# Altium PCB PCB1.PcbDoc
Units mm, origin at the board's own origin, x right, y up, seen from the top; angles counter-clockwise.
Board outline 74.42 x 66.29 mm, 2 copper layers (Top Layer, Bottom Layer); 23 components, 25 nets, 99 pads, 1 vias.
Unrouted connection lines stored in the file: 2.
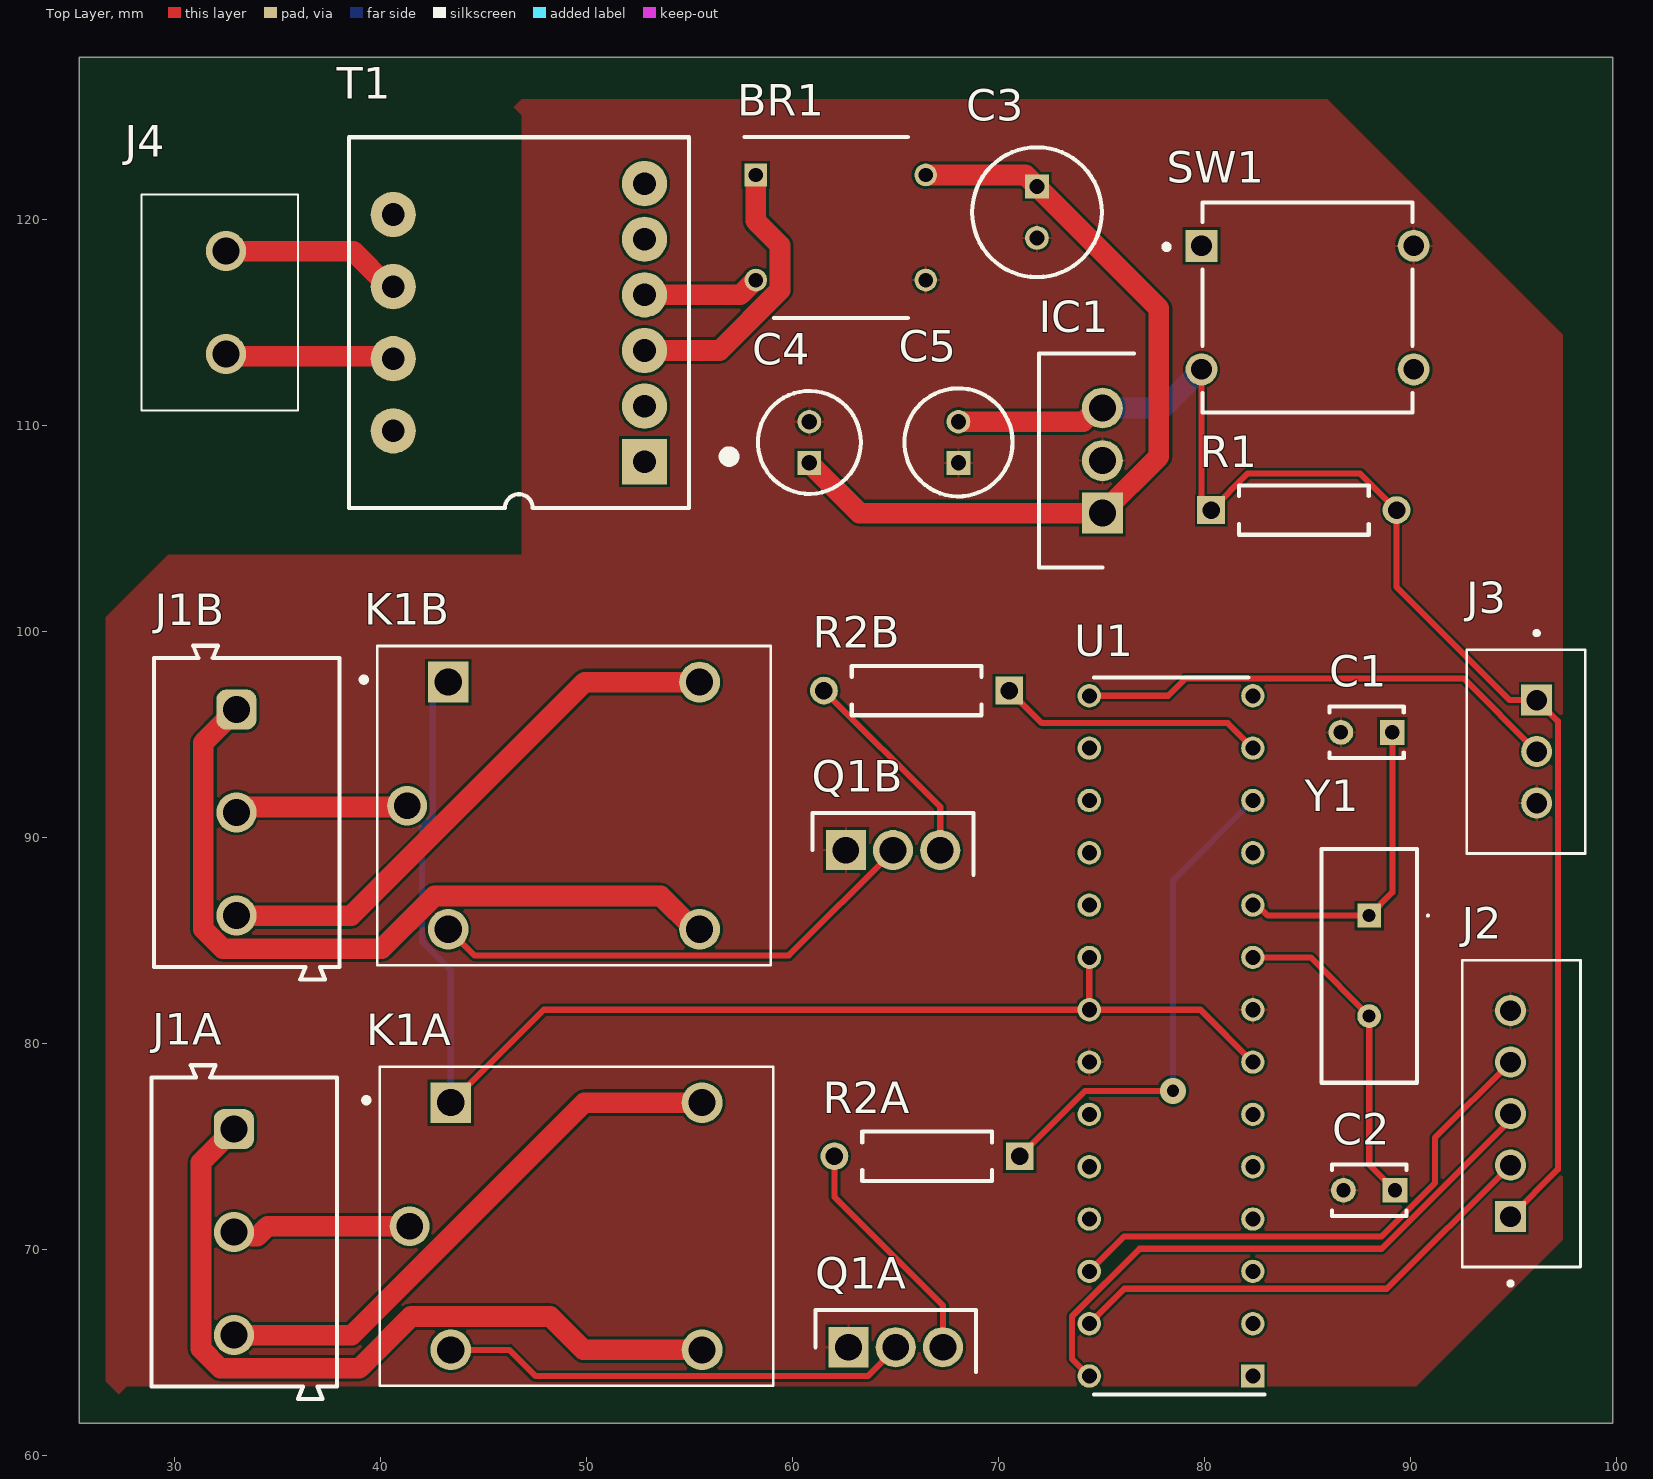
[diagram p0: Top Layer view]
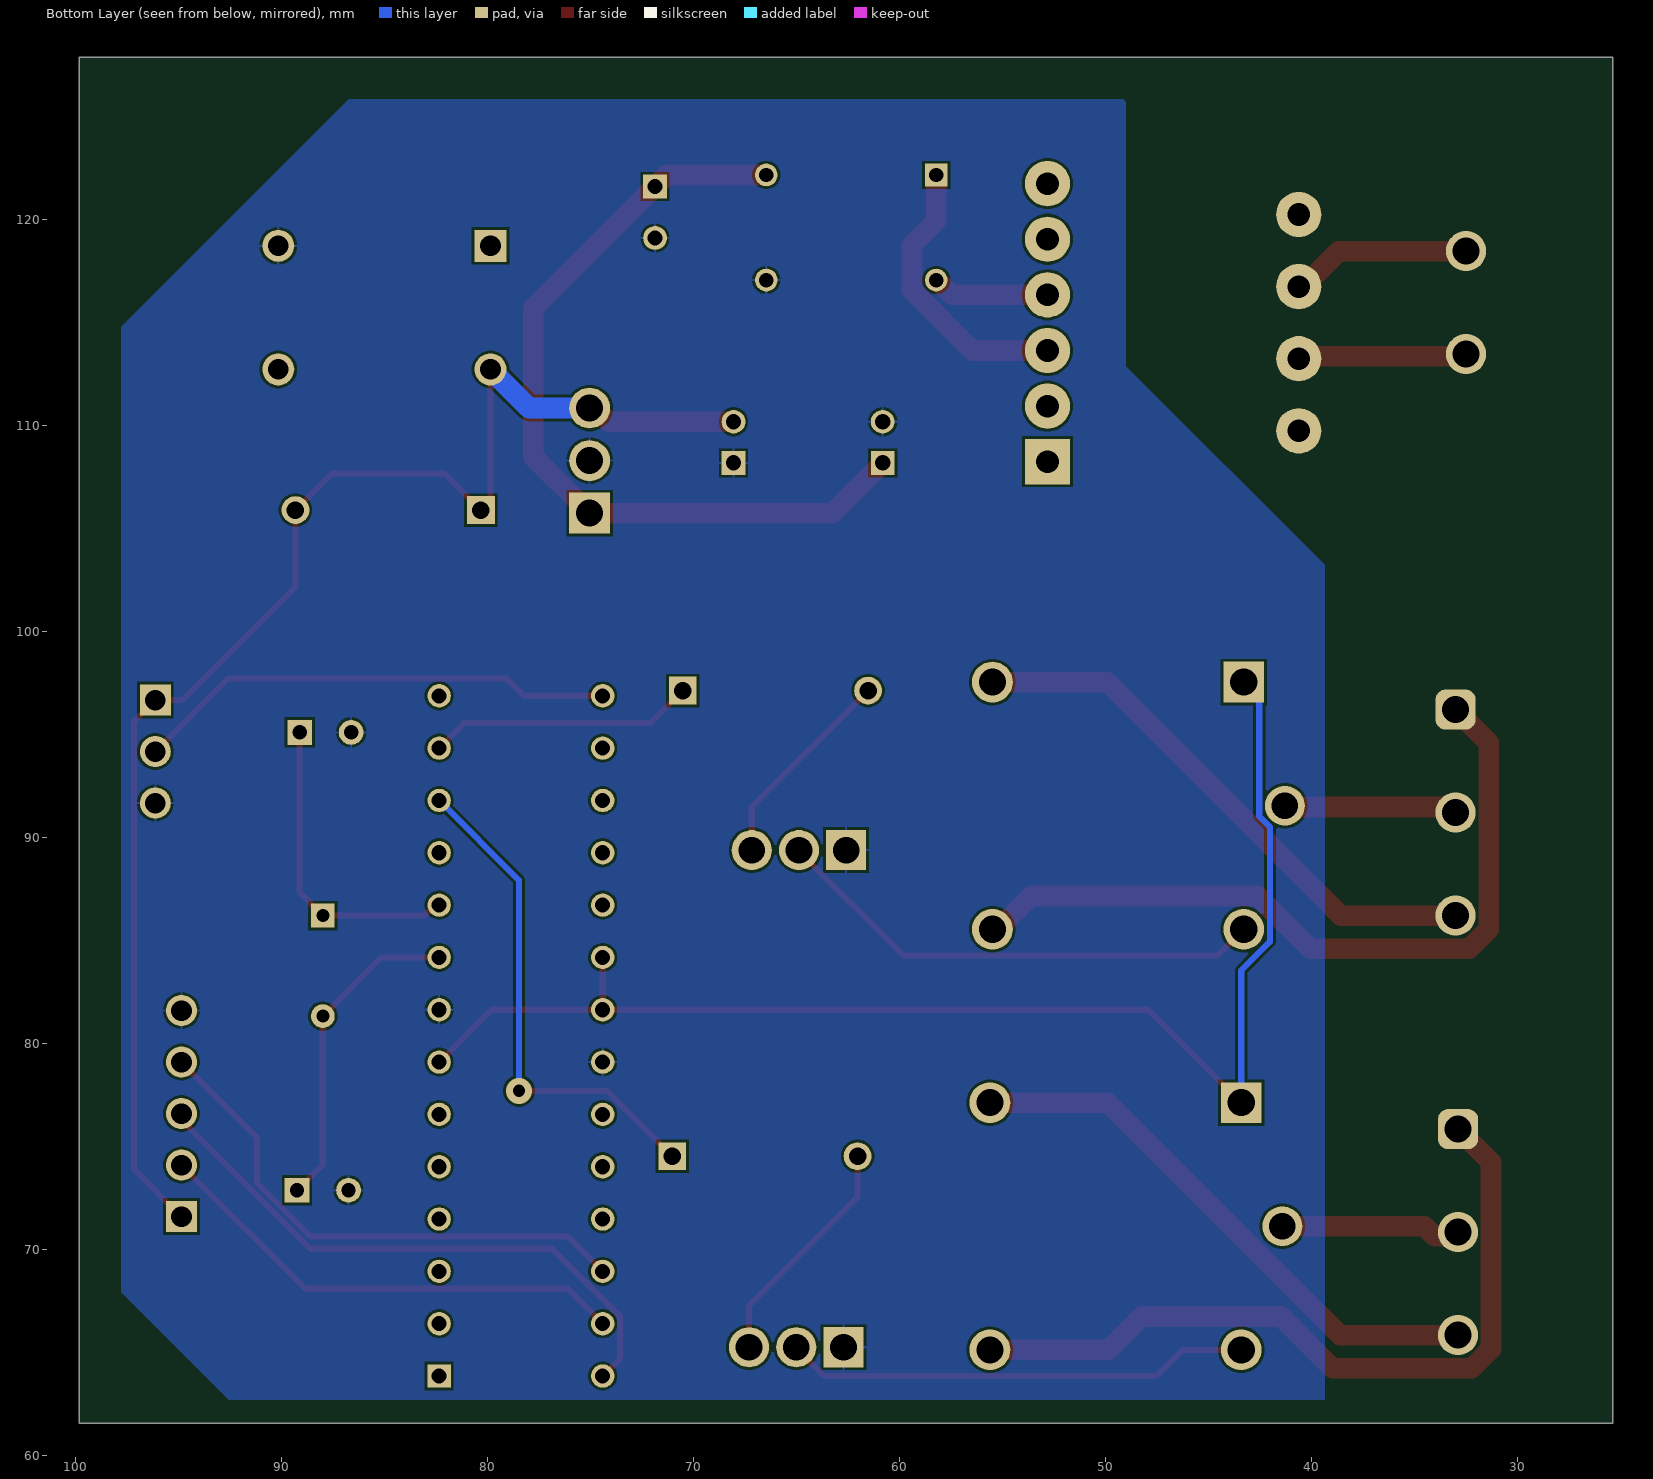
[diagram p1: Bottom Layer view, seen from below]
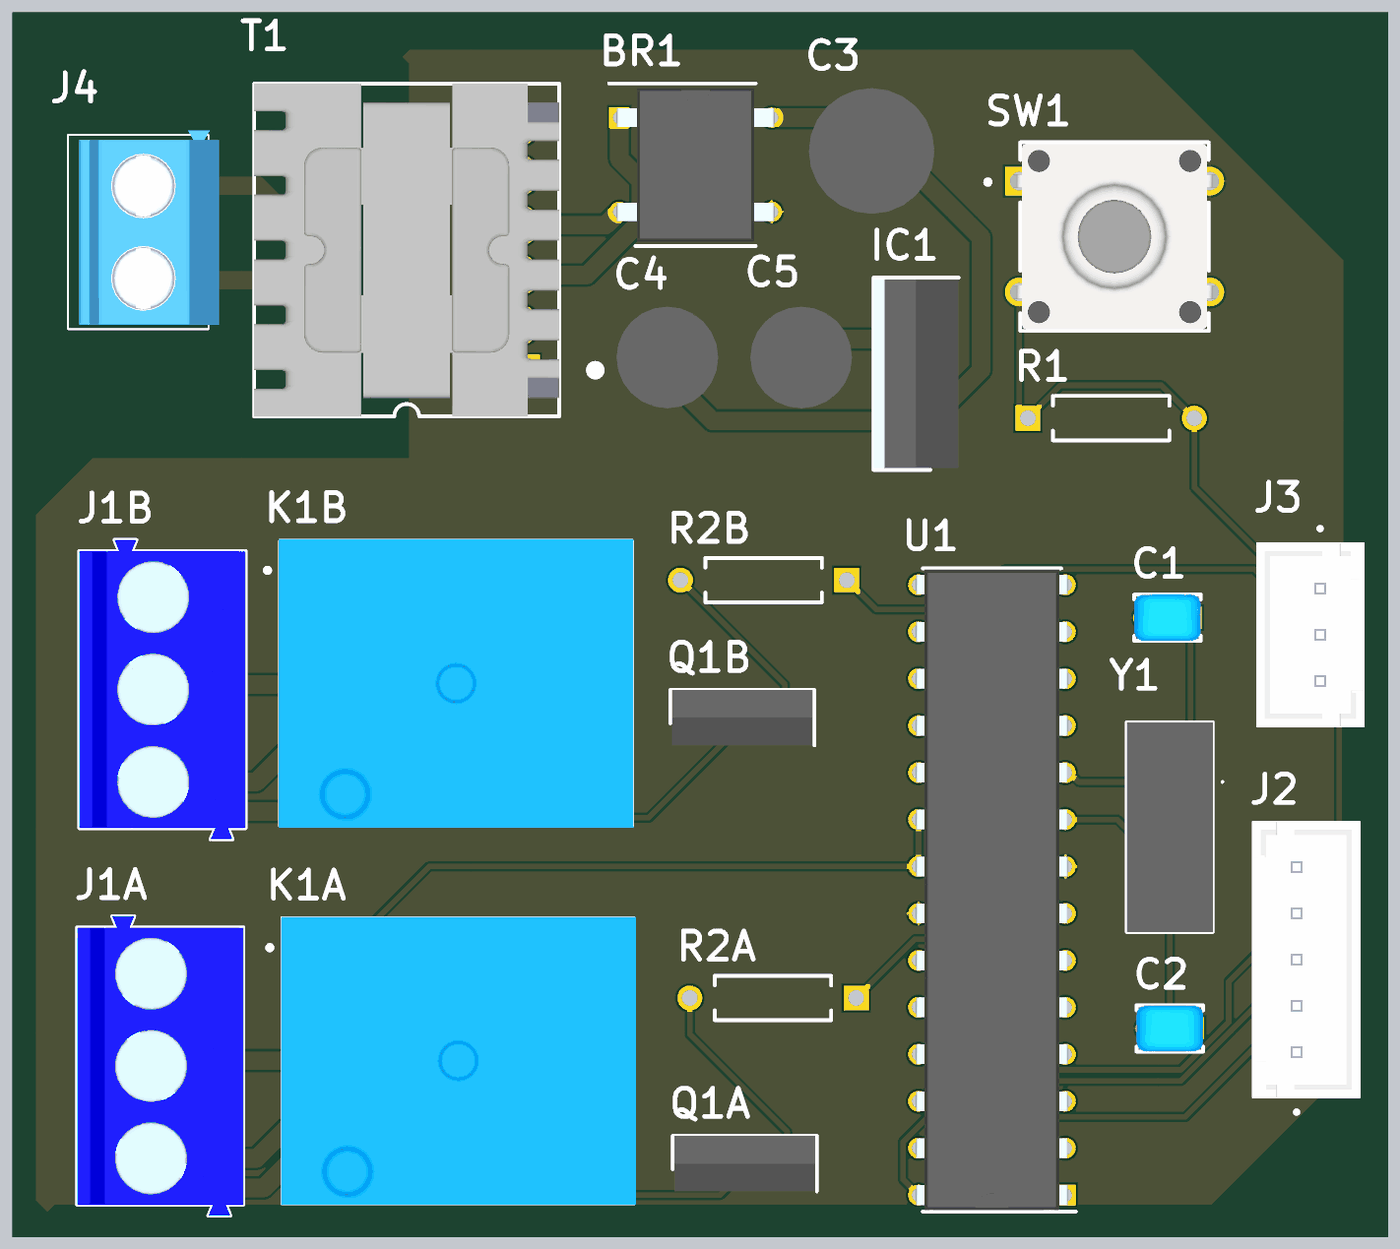
[diagram p2: 3D render of the assembled board from above, using the file's embedded part models]

## Layer stack, top to bottom
Top Solder: solder mask 0.0102, Solder Resist, Dk 3.5
Top Layer: signal copper 0.0356
Dielectric 1: dielectric 0.32, FR-4, Dk 4.8
Bottom Layer: signal copper 0.0356
Bottom Solder: solder mask 0.0102, Solder Resist, Dk 3.5

## Board outline
25.4,61.595 99.822,61.595 99.822,127.889 25.4,127.889

## Design rules (kind name [scope] priority, off if disabled: settings)
BoardOutlineClearance [All] p1: gap=0.2 ignorepadtopadclearanceinfootprint=FALSE
Clearance [All] p1: gap=0.127 ignorepadtopadclearanceinfootprint=FALSE except(0.25: Arc-Hole Track-Hole SMDPad-Hole THPad-Hole Via-Hole Fill-Hole Poly-Hole Region-Hole Text-Hole)
ComponentClearance [All] p1: gap=0.127 collisioncheckmode=3 verticalgap=0.127 showdistances=TRUE
DiffPairsRouting [All] p1: maxlimit=0.254 minlimit=0.127 mostfreqgap=0.127 toplayer_minwidth=0.127 toplayer_maxwidth=25.4 toplayer_prefwidth=0.127 bottomlayer_minwidth=0.127 bottomlayer_maxwidth=25.4 bottomlayer_prefwidth=0.127 maxuncoupledlength=12.7
Height [All] p1: minheight=0 maxheight=1816.048 prefheight=12.7
HoleSize [All] p1: absolutevalues=TRUE maxlimit=6.3 minlimit=0.3 maxpercent=80.000 minpercent=20.000
HoleToHoleClearance [All] p1: gap=0.25 allowstackedmicrovias=FALSE
MinimumAnnularRing [All] p1: minimumring=0.076
MinimumSolderMaskSliver [All] p1: minsoldermaskwidth=0
PlaneClearance [All] p1: clearance=0.127
PlaneConnect PlaneConnectPowerPads [InPadClass('PowerPads')] p1: planeconnectstyle=Direct reliefexpansion=0.508 reliefentries=4 reliefconductorwidth=0.254 reliefairgap=0.254
PlaneConnect [All] p2: pad.planeconnectstyle=Relief pad.reliefexpansion=0.3 pad.reliefentries=4 pad.reliefconductorwidth=0.127 pad.reliefairgap=0.127 via.planeconnectstyle=Direct via.reliefexpansion=0.3 via.reliefentries=4 via.reliefconductorwidth=0.127 via.reliefairgap=0.127
PolygonConnect PolygonConnectPowerPads [All vs (InPadClass('PowerPads'))] p1: connectstyle=Direct reliefconductorwidth=0.254 reliefentries=4 polygonreliefangle="90 Angle" airgapwidth=0.254
PolygonConnect [All] p2: thpad.connectstyle=Relief thpad.reliefconductorwidth=0.127 thpad.reliefentries=4 thpad.polygonreliefangle="90 Angle" thpad.airgapwidth=0.127 smdpad.connectstyle=Relief smdpad.reliefconductorwidth=0.127 smdpad.reliefentries=4 smdpad.polygonreliefangle="90 Angle" smdpad.airgapwidth=0.127 via.connectstyle=Direct via.reliefconductorwidth=0.127 via.reliefentries=4 via.polygonreliefangle="90 Angle" via.airgapwidth=0.127
RoutingVias [All] p1: holewidth=0.3 width=0.6 viastyle="Through Hole" minholewidth=0.3 minwidth=0.6 maxholewidth=0.6 maxwidth=6.6
SilkToSilkClearance [All] p1: silktosilkclearance=0
SilkToSolderMaskClearance [IsPad] p1: minsilkscreentomaskgap=0.127 clearancetoexposedcopper=TRUE
SolderMaskExpansion [All] p1: expansion=0.075 istentingtop=FALSE
Width [All] p1: maxlimit=1 minlimit=0.254 preferedwidth=0.3 minimp=50.000000 maximp=50.000000 favimp=50.000000
20 further rules are at their usual default settings.

## Classes and differential pairs
channel class Relay_Driver: RELAY1 RELAY2
component class RELAY2: J1B K1B Q1B R2B
component class RELAY1: J1A K1A Q1A R2A
component class POWER_SUPPLY: BR1 C3 C4 C5 IC1 J4 T1
component class MCU: C1 C2 R1 SW1 U1 Y1
component class Main: J2 J3

## Components (designator, comment, footprint, x,y, rotation, side; value= is the part's Value field where it differs from the comment)
BR1 "DB107" DIP825W50P510L830H340Q4N 62.357,119.634 r0 top
C1 "22pF" FP-RCE0DB-MFG 87.884,95.123 r180 top
C2 "22pF" FP-RCE0DB-MFG 88.011,72.898 r180 top
C3 "47uf" CAPPRD250W55D630H1220 71.882,121.626 r270 top
C4 "10uf" CAPPRD200W55D500H1200 60.833,108.204 r90 top
C5 "ECA-1AM101" CAPPRD200W55D525H1200 68.072,108.204 r90 top
IC1 "L7805CV-DG" TO255P460X1020X2008-3P 75.057,105.771 r90 top
J1A "Pneumatic Valve 1" 691101710003 33.401,70.866 r270 top (schematic designator J1)
J1B "Pneumatic Valve 1" 691101710003 33.52,91.233 r270 top (schematic designator J1)
J2 "RGB Sensor" JST_B5B-XH-A(LF)(SN) 95.394,76.621 r270 top
J3 "Proximity" "JST_B3B-XH-A (LF)(SN)" 95.614,94.194 r90 top
J4 "POWER IN" TB00250002BE 32.512,113.491 r90 top
K1A "SRD-05VDC-SL-C" RELAY_SRD-05VDC-SL-C 49.526,71.151 r0 top (schematic designator K1)
K1B "SRD-05VDC-SL-C" RELAY_SRD-05VDC-SL-C 49.403,91.567 r0 top (schematic designator K1)
Q1A "BD139G" TO229P300X760X1364-3P 62.734,65.278 r0 top (schematic designator Q1)
Q1B "BD139G" TO229P300X760X1364-3P 62.603,89.408 r0 top (schematic designator Q1)
R1 "MFR-25FBF52-10K" RESA60-630X240 84.836,105.918 r0 top value=10k
R2A "MFR-25FBF52-1K" RESA60-630X240 66.548,74.549 r180 top value=1k (schematic designator R2)
R2B "MFR-25FBF52-1K" RESA60-630X240 66.04,97.155 r180 top value=1k (schematic designator R2)
SW1 "RESET" FP-SKQBARA010-MFG 85.02,115.745 r0 top
T1 "7491182012" "EE16_7_4 (E16)" 46.732,115.015 r180 top
U1 "ATMEGA328P-PU" DIP794W53P254L3467H457Q28N 78.391,80.391 r180 top
Y1 "ECS-160-S-4X" ECS160S4X 88.011,86.233 r270 top

## Footprints (in the part's own frame and the unit in brackets; to place one, negate y for a bottom-side part, rotate by r counter-clockwise, add the part's x,y. Pads: shape width x height; smd on the part's side, far side on the other; paste and mask are expansions set on the pad)
691101710003 [mm] "5,00mm - modular - blue - Horizontal entry with pressure clamp - 12,6mm height - 03p"
  rrect50% 1.95x1.95 hole 1.3: 1(-5,-0.5)
  round 1.95 hole 1.3: 2(0,-0.5) 3(5,-0.5)
  silkscreen extent -8.1,-4.5 8.1,4.5, body extent -8.1,-4.5 8.1,4.5, height 12.65
CAPPRD200W55D500H1200 [mm]
  rect 1.15x1.15 hole 0.75: 1(0,0)
  round 1.15 hole 0.75: 2(2,0)
  silkscreen extent -1.5,-2.5 3.5,2.5, body extent -1.75,-2.75 3.75,2.75, height 12
CAPPRD200W55D525H1200 [mm]
  rect 1.15x1.15 hole 0.75: 1(0,0)
  round 1.15 hole 0.75: 2(2,0)
  silkscreen extent -1.62,-2.63 3.62,2.62, body extent -1.75,-2.75 3.75,2.75, height 12
CAPPRD250W55D630H1220 [mm]
  rect 1.15x1.15 hole 0.75: 1(0,0)
  round 1.15 hole 0.75: 2(2.5,0)
  silkscreen extent -1.9,-3.15 4.4,3.15, body extent -2.15,-3.4 4.65,3.4, height 12.2
DIP794W53P254L3467H457Q28N [mm]
  rect 1.133x1.133 hole 0.733: 1(-3.969,16.51)
  round 1.133 hole 0.733: 2(-3.969,13.97) 3(-3.969,11.43) 4(-3.969,8.89) 5(-3.969,6.35) 6(-3.969,3.81) 7(-3.969,1.27) 8(-3.969,-1.27) 9(-3.969,-3.81) 10(-3.969,-6.35) 11(-3.969,-8.89) 12(-3.969,-11.43) 13(-3.969,-13.97) 14(-3.969,-16.51) 15(3.969,-16.51) 16(3.969,-13.97) 17(3.969,-11.43) 18(3.969,-8.89) 19(3.969,-6.35) 20(3.969,-3.81) 21(3.969,-1.27) 22(3.969,1.27) 23(3.969,3.81) 24(3.969,6.35) 25(3.969,8.89) 26(3.969,11.43) 27(3.969,13.97) 28(3.969,16.51)
  silkscreen extent -4.53,-17.4 3.75,17.4, body extent -4.1,-17.34 4.1,17.34, height 4.57
DIP825W50P510L830H340Q4N [mm]
  rect 1.1x1.1 hole 0.7: 1(-4.125,2.55)
  round 1.1 hole 0.7: 2(-4.125,-2.55) 3(4.125,-2.55) 4(4.125,2.55)
  silkscreen extent -4.67,-4.4 3.25,4.4, body extent -4.25,-4.15 4.25,4.15, height 3.4
ECS160S4X [mm]
  rect 1.155x1.155 hole 0.63: 1(0,0)
  round 1.155 hole 0.63: 2(4.88,0)
  silkscreen extent -3.23,-2.32 8.12,2.9, body extent -3.23,-2.32 8.12,2.32, height 3.6
"EE16_7_4 (E16)" [mm] "THT, 10-Leads, Body 18x16.5mm (max), Pitch 2.7mm"
  rect 2.2x2.2 hole 1.1: 1(-6.1,6.75)
  round 2.2 hole 1.1: 2(-6.1,4.05) 3(-6.1,1.35) 4(-6.1,-1.35) 5(-6.1,-4.05) 6(-6.1,-6.75) 7(6.1,-5.25) 8(6.1,-1.75) 9(6.1,1.75) 10(6.1,5.25)
  silkscreen extent -10.4,-9 8.25,9, body extent -8.25,-9 8.25,9, height 18.2
FP-RCE0DB-MFG [mm]
  rect 1.2x1.2 hole 0.7 paste-1000 mask+0: 1(-1.25,0)
  round 1.2 hole 0.7 paste-1000 mask+0: 2(1.25,0)
  silkscreen extent -1.8,-1.25 1.8,1.25, body extent -1.95,-1.35 1.95,1.35, height 0.25
FP-SKQBARA010-MFG [mm]
  rect 1.55x1.55 hole 1 paste-1000 mask+0: 1(-5.15,3)
  round 1.55 hole 1 paste-1000 mask+0: 2(5.15,3) 3(-5.15,-3) 4(5.15,-3)
  silkscreen extent -6.97,-5.1 5.1,5.1, body extent -6.02,-5.2 6.02,5.2, height 0.25
"JST_B3B-XH-A (LF)(SN)" [mm]
  rect 1.508x1.508 / inner round 1.508 / far side rect 1.508x1.508 hole 1: 1(2.5,-0.525)
  round 1.508 hole 1: 2(0,-0.525) 3(-2.5,-0.525)
  silkscreen extent -4.95,-2.88 5.85,2.88, body extent -4.95,-2.88 4.95,2.88, height 7
JST_B5B-XH-A(LF)(SN) [mm]
  rect 1.508x1.508 / inner round 1.508 / far side rect 1.508x1.508 hole 1: 1(5,-0.525)
  round 1.508 hole 1: 2(2.5,-0.525) 3(0,-0.525) 4(-2.5,-0.525) 5(-5,-0.525)
  silkscreen extent -7.45,-2.88 8.35,2.88, body extent -7.45,-2.88 7.45,2.88, height 7
RELAY_SRD-05VDC-SL-C [mm]
  rect 1.98x1.98 / inner round 1.98 / far side rect 1.98x1.98 hole 1.32: A1(-6.1,6)
  round 1.98 hole 1.32: A2(-6.1,-6) NC(6.1,6) NO(6.1,-6)
  round 1.935 hole 1.29: COM(-8.1,0)
  silkscreen extent -10.3,-7.75 9.55,7.75, body extent -9.6,-7.8 9.6,7.8, height 15.8
RESA60-630X240 [mm] "Axial Resistor, 2-Leads, Dia 2.4mm, Body Length 6.3mm"
  rect 1.35x1.35 hole 0.85: 1(-4.5,0)
  round 1.35 hole 0.85: 2(4.5,0)
  silkscreen extent -3.15,-1.2 3.15,1.2, body extent -4.77,-1.19 4.77,1.2, height 2.4
TB00250002BE [mm]
  round 1.95 hole 1.3: 1(0,0) 2(5,0)
  silkscreen extent -2.75,-3.5 7.75,4.1, body extent -2.51,-4.08 7.99,3.52, height 9.99
TO229P300X760X1364-3P [mm]
  rect 1.95x1.95 hole 1.3: 1(0,0)
  round 1.95 hole 1.3: 2(2.29,0) 3(4.58,0)
  silkscreen extent -1.61,-1.19 6.19,1.81, body extent -1.51,-1.19 6.09,1.81, height 12.76
TO255P460X1020X2008-3P [mm]
  rect 1.98x1.98 hole 1.32: 1(0,0)
  round 1.98 hole 1.32: 2(2.55,0) 3(5.1,0)
  silkscreen extent -2.65,-1.53 7.75,3.07, body extent -2.55,-1.53 7.65,3.07, height 19.21

## Part data
BR1: "Bridge Rectifier", Manufacturer_Name=Rectron, Mouser Part Number=583-DB107, Datasheet Link=https://www.rectron.com/data_sheets/db101-107.pdf, Height=3.4mm, Manufacturer_Part_Number=DB107, Mouser Price/Stock=https://www.mouser.co.uk/ProductDetail/Rectron/DB107?qs=G5AQjGfRJcLGAY%252B6bEDnbw%3D%3D
C1 C2: library part CMP-06035-047347-1, "Cap Ceramic 22pF 100V C0G ±5% Radial 2.5mm +125°C Ammo Pack", Case/Package=Radial, Dielectric=C0G, Max Operating Temperature=125°C, Min Operating Temperature=-55°C, Package Quantity=2000, Ratings=AEC-Q200, Resistor Type=Ceramic, Tolerance=5%, Voltage=100V, Capacitance=22pF, Depth=2.5mm, Height=3.5mm, Height - Seated (Max)=0.138inch, Lead Diameter=0.5mm, Lead Pitch=0.098inch, Lead/Base Style=Straight, Length=3.6mm, Mount="Through Hole", Packaging="Tape and Reel", Termination=Radial, Voltage Rating=100V, Voltage Rating (DC)=100V, Width=0.098inch
C3: library part ECE-A1EN470UB, "Capacitor Polarised", Manufacturer_Name=Panasonic, Mouser Part Number=667-ECE-A1EN470UB, Datasheet Link=http://industrial.panasonic.com/cdbs/www-data/pdf/RDF0000/ABA0000C1053.pdf, Height=12.2mm, Manufacturer_Part_Number=ECE-A1EN470UB, Mouser Price/Stock=https://www.mouser.co.uk/ProductDetail/Panasonic/ECE-A1EN470UB?qs=rMMd5vBiahp%252B1Xr0dP1Lmg%3D%3D
C4: library part ECA-1EM100, "Capacitor Polarised", Manufacturer_Name=Panasonic, Mouser Part Number=667-ECA-1EM100, Arrow Part Number=ECA-1EM100, Arrow Price/Stock=https://www.arrow.com/en/products/eca1em100/panasonic, Datasheet Link=https://componentsearchengine.com/Datasheets/2/ECA-1EM100.pdf, Height=12mm, Manufacturer_Part_Number=ECA-1EM100, Mouser Price/Stock=https://www.mouser.com/Search/Refine.aspx?Keyword=667-ECA-1EM100
C5: "Capacitor", Manufacturer_Name=Panasonic, Mouser Part Number=667-ECA-1AM101, Arrow Part Number=ECA-1AM101, Arrow Price/Stock=https://www.arrow.com/en/products/eca-1am101/panasonic?region=nac, Datasheet Link=http://uk.rs-online.com/web/p/products/8073233, Height=12mm, Manufacturer_Part_Number=ECA-1AM101, Mouser Price/Stock=https://www.mouser.co.uk/ProductDetail/Panasonic/ECA-1AM101?qs=o8jAzVTWolupLSuBsMrKhQ%3D%3D
IC1: "Integrated Circuit", Manufacturer_Name=STMicroelectronics, Mouser Part Number=511-L7805CV-DG, Arrow Part Number=L7805CV-DG, Arrow Price/Stock=https://www.arrow.com/en/products/l7805cv-dg/stmicroelectronics?region=europe, Datasheet Link=http://www.st.com/web/en/resource/technical/document/datasheet/CD00000444.pdf, Height=4.6mm, Manufacturer_Part_Number=L7805CV-DG, Mouser Price/Stock=https://www.mouser.co.uk/ProductDetail/STMicroelectronics/L7805CV-DG?qs=T%2FOtf55vL7c3O0as9P9fAw%3D%3D
J1A J1B: library part CMP-1502-03257-2, Color=Blue, Current=16A, Max Operating Temperature=105°C, Min Operating Temperature=-40°C, Voltage=250V, Contact Material=Brass, Contact Plating=Tin, Current Rating=16A, Height=16.4mm, Housing Material=Nylon, Lead Pitch=5mm, Length=9mm, Mount="Through Hole", NexarPartId=8917705, Number of Contacts=3, Number of Levels=1, Number of Pins=3, Number of Positions Per Level=3, Packaging=Box, Pitch=5.0038mm, Plating=Steel, REACH SVHC=Unknown, RoHS=Compliant, Stripping Length=-7mm, Termination=Screw, Voltage Rating=250V, Width=16.2mm, Wire Gauge (Max)=26AWG, Wire Gauge (Min)=14AWG, Wire/Cable Gauge=26AWG
J2: library part B5B-XH-A(LF)(SN), "Connector Header Through Hole 5 position 0.098 (2.50mm)", Package=None, Check_prices=https://www.snapeda.com/parts/B5B-XH-A(LF)(SN)/JST+Sales+America+Inc./view-part/?ref=eda, MF="JST Sales America Inc.", MP=B5B-XH-A(LF)(SN), SnapEDA_Link=https://www.snapeda.com/parts/B5B-XH-A(LF)(SN)/JST+Sales+America+Inc./view-part/?ref=snap
J3: library part B3B-XH-A_(LF)(SN), "Connector Header Through Hole 3 position 0.098 (2.50mm)", Package=None, Check_prices=https://www.snapeda.com/parts/B3B-XH-A%20(LF)(SN)/JST+Sales+America+Inc./view-part/?ref=eda, MF="JST Sales America Inc.", MP="B3B-XH-A (LF)(SN)", SnapEDA_Link=https://www.snapeda.com/parts/B3B-XH-A%20(LF)(SN)/JST+Sales+America+Inc./view-part/?ref=snap
J4: library part TB002-500-02BE, "Connector", Manufacturer_Name="CUI Devices", Mouser Part Number=490-TB002-500-02BE, Arrow Part Number=TB002-500-02BE, Arrow Price/Stock=https://www.arrow.com/en/products/tb002-500-02be/cui-devices?region=nac, Datasheet Link=https://eu.mouser.com/datasheet/2/670/tb002_500-1550579.pdf, Height=10.4mm, Manufacturer_Part_Number=TB002-500-02BE, Mouser Price/Stock=https://www.mouser.co.uk/ProductDetail/CUI-Devices/TB002-500-02BE?qs=vLWxofP3U2x9716kcgva%2Fw%3D%3D
K1A K1B: "5V Trigger Relay Module For Arduino And Raspberry Pi 5V Trigger Relay Module For Arduino And Raspberry Pi", Package="NON STANDARD-5 Songle Relay", Availability="Not in stock", Check_prices=https://www.snapeda.com/parts/SRD-05VDC-SL-C/Songle+Relay/view-part/?ref=eda, MF="Songle Relay", MP=SRD-05VDC-SL-C, Price=None, SnapEDA_Link=https://www.snapeda.com/parts/SRD-05VDC-SL-C/Songle+Relay/view-part/?ref=snap
Q1A Q1B: "Transistor BJT NPN", Manufacturer_Name=onsemi, Mouser Part Number=863-BD139G, Arrow Part Number=BD139G, Arrow Price/Stock=https://www.arrow.com/en/products/bd139g/on-semiconductor?region=nac, Datasheet Link=http://www.onsemi.com/pub/Collateral/BD135-D.PDF, Height=3mm, Manufacturer_Part_Number=BD139G, Mouser Price/Stock=https://www.mouser.co.uk/ProductDetail/onsemi/BD139G?qs=vNc2DXHODiLIqGggNMT6cg%3D%3D
R1: library part CMP-009-00047-4, "Axial Resistor, 10 KOhm, +/- 1%, 0.25 W, -55 to 155 degC, 2-Pin THD, RoHS, Bulk", Case/Package=Axial, Manufacturer=Yageo, Max Operating Temperature=155°C, Min Operating Temperature=-55°C, Package Description="2-Pin Axial Lead, Dia 2.4 mm, Body Length 6.3 mm", Package Quantity=200, Package Reference=MFR-25, Power=250mW, Tolerance=1%, Voltage Rating=250V, Datasheet URL=http://www.yageo.com/documents/recent/Yageo%20LR_MFR_2013.pdf, Datasheet Version=Apr-13, Manufacturer URL=http://www.yageo.com/, Mounting Technology=TH, Packaging=Bulk, RoHS Compliant=True
R2A R2B: library part CMP-009-00048-4, "Axial Resistor, 1 KOhm, +/- 1%, 250 mW, -55 to 155 degC, 2-Pin THD, RoHS, Bulk", Case/Package=Axial, Manufacturer=Yageo, Max Operating Temperature=155°C, Min Operating Temperature=-55°C, Package Description="2-Pin Axial Lead, Dia 2.4 mm, Body Length 6.3 mm", Package Quantity=200, Package Reference=MFR-25, Power=250mW, Tolerance=1%, Voltage Rating=250V, Composition=CarbonFilm, Datasheet URL=http://www.yageo.com/documents/recent/Yageo%20LR_MFR_2013.pdf, Datasheet Version=Apr-13, Manufacturer URL=http://www.yageo.com/, Mounting Technology=TH, Packaging=Bulk, RoHS Compliant=True
SW1: library part CMP-00631-07849992-1, "SKQBARA010 Switch Tactile N.O. SPST Round Button PC Pins 0.05A 12VDC 1.57N Thru-Hole Automotive", Color=Grey, Contact Current Rating=50mA, Contact Resistance=500mΩ, Max Operating Temperature=90°C, Max Voltage Rating (DC)=12V, Min Operating Temperature=-40°C, Operating Force=1.57N, Actuator Length=850µm, Contact Plating=Silver, Current Rating=50mA, Depth=10.3mm, Electrical Life=100kcycles, Height=5mm, Lead Free="Lead Free", Length=10mm, Life (Cycles)=100kcycles, Max Current Rating=50mA, Mount="Through Hole", NexarPartId=7849992, Number of Positions=2, Orientation=Straight, Packaging=Bulk, Radiation Hardening=No, RoHS=Compliant, Schedule B="8536509065, 8536509065", Termination="PC Pins", Throw Configuration=SPST, Voltage Rating (DC)=12V
T1: library part CMP-1471-00001-1, "Off-Line Transformer WE-UNIT , L=0.9mH", Inductance=0.9mH, Input Voltage (AC)=85-265, Manufacturer="Wuerth Elektronik", Output Current (A)=0.6, Output Voltage (DC)=12, ComponentLink1Description="Manufacturer URL", ComponentLink1URL=http://www.we-online.com, ComponentLink2Description=Datasheet, ComponentLink2URL=http://www.we-online.de/katalog/media/pdf/7491182012.pdf, PackageReference="EE16_7_4 (E16)", PartNumber=7491182012, Turns Ratio="\"9.5\",\"1:1\""
U1: "Integrated Circuit", Manufacturer_Name=Microchip, Mouser Part Number=556-ATMEGA328P-PU, Arrow Part Number=ATMEGA328P-PU, Arrow Price/Stock=https://www.arrow.com/en/products/atmega328p-pu/microchip-technology?region=europe, Datasheet Link=https://www.mouser.ca/datasheet/2/268/ATmega48A_PA_88A_PA_168A_PA_328_P_DS_DS40002061B-3050139.pdf, Height=4.572mm, Manufacturer_Part_Number=ATMEGA328P-PU, Mouser Price/Stock=https://www.mouser.co.uk/ProductDetail/Microchip-Technology/ATMEGA328P-PU?qs=K8BHR703ZXguOQv3sKbWcg%3D%3D
Y1: "Crystal or Oscillator", Manufacturer_Name=ECS, Mouser Part Number=520-HCU1600-SX, Arrow Part Number=ECS-160-S-4X, Arrow Price/Stock=https://www.arrow.com/en/products/ecs-160-s-4x/ecs-international?region=nac, Datasheet Link=http://www.ecsxtal.com/store/pdf/hc-49usx.pdf, Height=3.5mm, Manufacturer_Part_Number=ECS-160-S-4X, Mouser Price/Stock=https://www.mouser.co.uk/ProductDetail/ECS/ECS-160-S-4X?qs=CNVyLAqdhH109We7RtSowA%3D%3D

## Via types
v1: diameter 1.27, hole 0.6, Top Layer to Bottom Layer, 1 vias

## Nets (pads, with @x,y where several pads share a name; then routed paths per layer and width w, separated by ;. In a path a pad name is that pad's centre, name@x,y a point inside that pad or via, vN(x,y) a via of type N, cw(c..) or ccw(c..) an arc to the next point about the centre after c; other vN are vias at no path point)
+5: C5.2 IC1.3 J2.1 J3.1 K1A.A1 K1B.A1 R1.1 R1.2 SW1.3 U1.1 U1.7 U1.20 U1.21 | length 135.5
  Top Layer w0.3: K1A.A1 47.936,81.661 U1.21 ; U1.20 U1.21 ; SW1.3 79.87,106.384 R1.1 82.114,107.696 87.558,107.696 R1.2 89.336,102.18 94.822,96.694 J3.1 97.17,95.663 97.17,73.922 J2.1 ; U1.7 79.82,81.661 U1.21
  Top Layer w1: C5.2 74.125,110.204 74.792,110.871 IC1.3
  Bottom Layer w0.3: K1B.A1 42.548,96.812 42.548,91.052 42.036,90.54 42.036,84.961 43.426,83.571 K1A.A1
  Bottom Layer w1: IC1.3 77.996,110.871 SW1.3
GND: BR1.3 C1.2 C2.2 C3.2 C4.2 C5.1 IC1.2 J2.5 J3.3 Q1A.1 Q1B.1 SW1.2 U1.8 U1.22 | length 0.3
  Top Layer w1: C4.2 C4.2@60.87,110.204 ; IC1.2 IC1.2@75.057,108.584
NetBR1_1: BR1.1 T1.3 | length 13.9
  Top Layer w1: T1.3 56.478,113.665 59.409,116.596 59.409,118.777 58.232,119.954 BR1.1
NetBR1_2: BR1.2 T1.4 | length 5.7
  Top Layer w1: T1.4 57.486,116.365 58.205,117.084 BR1.2
NetBR1_4: BR1.4 C3.1 C4.1 IC1.1 | length 40.3
  Top Layer w1: C4.1 63.266,105.771 IC1.1 77.801,108.515 77.801,115.707 C3.1 71.324,122.184 BR1.4
NetC1_1: C1.1 U1.10 Y1.1 | length 15.2
  Top Layer w0.3: U1.10 82.585,86.741 83.093,86.233 Y1.1 89.134,87.356 C1.1
NetC2_1: C2.1 U1.9 Y1.2 | length 15.8
  Top Layer w0.3: U1.9 85.163,84.201 Y1.2 88.011,74.148 C2.1
NetJ1A_1: J1A.1 K1A.NO | length 37.7
  Top Layer w1: J1A.1 31.299,74.264 31.299,65.203 32.237,64.264 38.992,64.264 41.496,66.768 48.25,66.768 49.867,65.151 K1A.NO
NetJ1A_2: J1A.2 K1A.COM | length 7.8
  Top Layer w1: J1A.2@33.782,70.659 34.039,70.659 34.531,71.151 K1A.COM
NetJ1A_3: J1A.3 K1A.NC | length 27.4
  Top Layer w1: J1A.3 38.617,65.866 49.902,77.151 K1A.NC
NetJ1B_1: J1B.1 K1B.NO | length 37.5
  Top Layer w1: J1B.1 31.418,94.631 31.418,85.569 32.356,84.631 40.08,84.631 42.633,87.184 53.621,87.184 55.238,85.567 K1B.NO
NetJ1B_2: J1B.2 K1B.COM | length 7.8
  Top Layer w1: J1B.2@33.52,91.44 33.584,91.503 41.239,91.503 K1B.COM
NetJ1B_3: J1B.3 K1B.NC | length 27.2
  Top Layer w1: J1B.3 38.59,86.233 49.924,97.567 K1B.NC
NetJ2_2: J2.2 U1.27 | length 23.6
  Top Layer w0.3: U1.27 76.118,68.117 88.865,68.117 J2.2
NetJ2_3: J2.3 U1.28 | length 28.8
  Top Layer w0.3: U1.28 73.578,64.725 73.578,66.77 76.864,70.056 88.614,70.056 94.869,76.31 J2.3
NetJ2_4: J2.4 U1.26 | length 25.9
  Top Layer w0.3: U1.26 76.118,70.657 88.612,70.657 91.199,73.244 91.199,75.451 J2.4
NetJ3_2: J3.2 U1.15 | length 23.5
  Top Layer w0.3: U1.15 78.257,96.901 79.1,97.745 92.588,97.745 J3.2
NetJ4_1: J4.1 T1.9 | length 8.2
  Top Layer w1: J4.1 32.625,113.378 40.519,113.378 T1.9
NetJ4_2: J4.2 T1.8 | length 8.8
  Top Layer w1: J4.2 38.681,118.491 40.407,116.765 T1.8
NetK1A_A2: K1A.A2 Q1A.2 | length 22.7
  Top Layer w0.3: K1A.A2 46.267,65.151 47.534,63.884 63.682,63.884 65.024,65.226 Q1A.2
NetK1B_A2: K1B.A2 Q1B.2 | length 24.3
  Top Layer w0.3: K1B.A2 44.57,84.3 59.837,84.3 64.893,89.356 Q1B.2
NetQ1A_3: Q1A.3 R2A.2 | length 11.5
  Top Layer w0.3: R2A.2 62.048,72.572 67.314,67.306 Q1A.3
NetQ1B_3: Q1B.3 R2B.2 | length 10.1
  Top Layer w0.3: R2B.2 67.183,91.512 Q1B.3
NetR2A_1: R2A.1 U1.12 | length 24.5
  Top Layer w0.3: R2A.1 74.223,77.724 v1(78.486,77.724)
  Bottom Layer w0.3: v1(78.486,77.724) 78.486,87.947 U1.12
NetR2B_1: R2B.1 U1.13 | length 13
  Top Layer w0.3: R2B.1 72.12,95.575 81.146,95.575 U1.13
pads on no net: SW1.1 SW1.4 T1.1 T1.2 T1.5 T1.6 T1.7 T1.10 U1.2 U1.3 U1.4 U1.5 U1.6 U1.11 U1.14 U1.16 U1.17 U1.18 U1.19 U1.23 U1.24 U1.25

## Polygon pours and split planes (outlines as drawn)
GND on Top Layer "GND_L01_P000" (solid, pour order 0): 46.482,125.476 46.863,125.095 46.863,103.759 29.718,103.759 26.67,100.711 26.67,63.627 27.305,62.992 27.686,63.373 90.297,63.373 97.409,70.485 97.409,114.427 85.979,125.857 46.863,125.857 46.736,125.73
GND on Bottom Layer "GND_L02_P001" (solid, pour order 1): 49.022,125.73 49.149,125.857 86.741,125.857 97.79,114.808 97.79,67.945 92.583,62.738 39.37,62.738 39.37,103.251 49.022,112.903